# Altium PCB MCU_TO_USB.PcbDoc
Units mil, origin at the board's own origin, x right, y up, seen from the top; angles counter-clockwise.
Board outline 6000 x 4000 mil, 2 copper layers (Top Layer, Bottom Layer); 38 components, 39 nets, 148 pads, 32 vias.
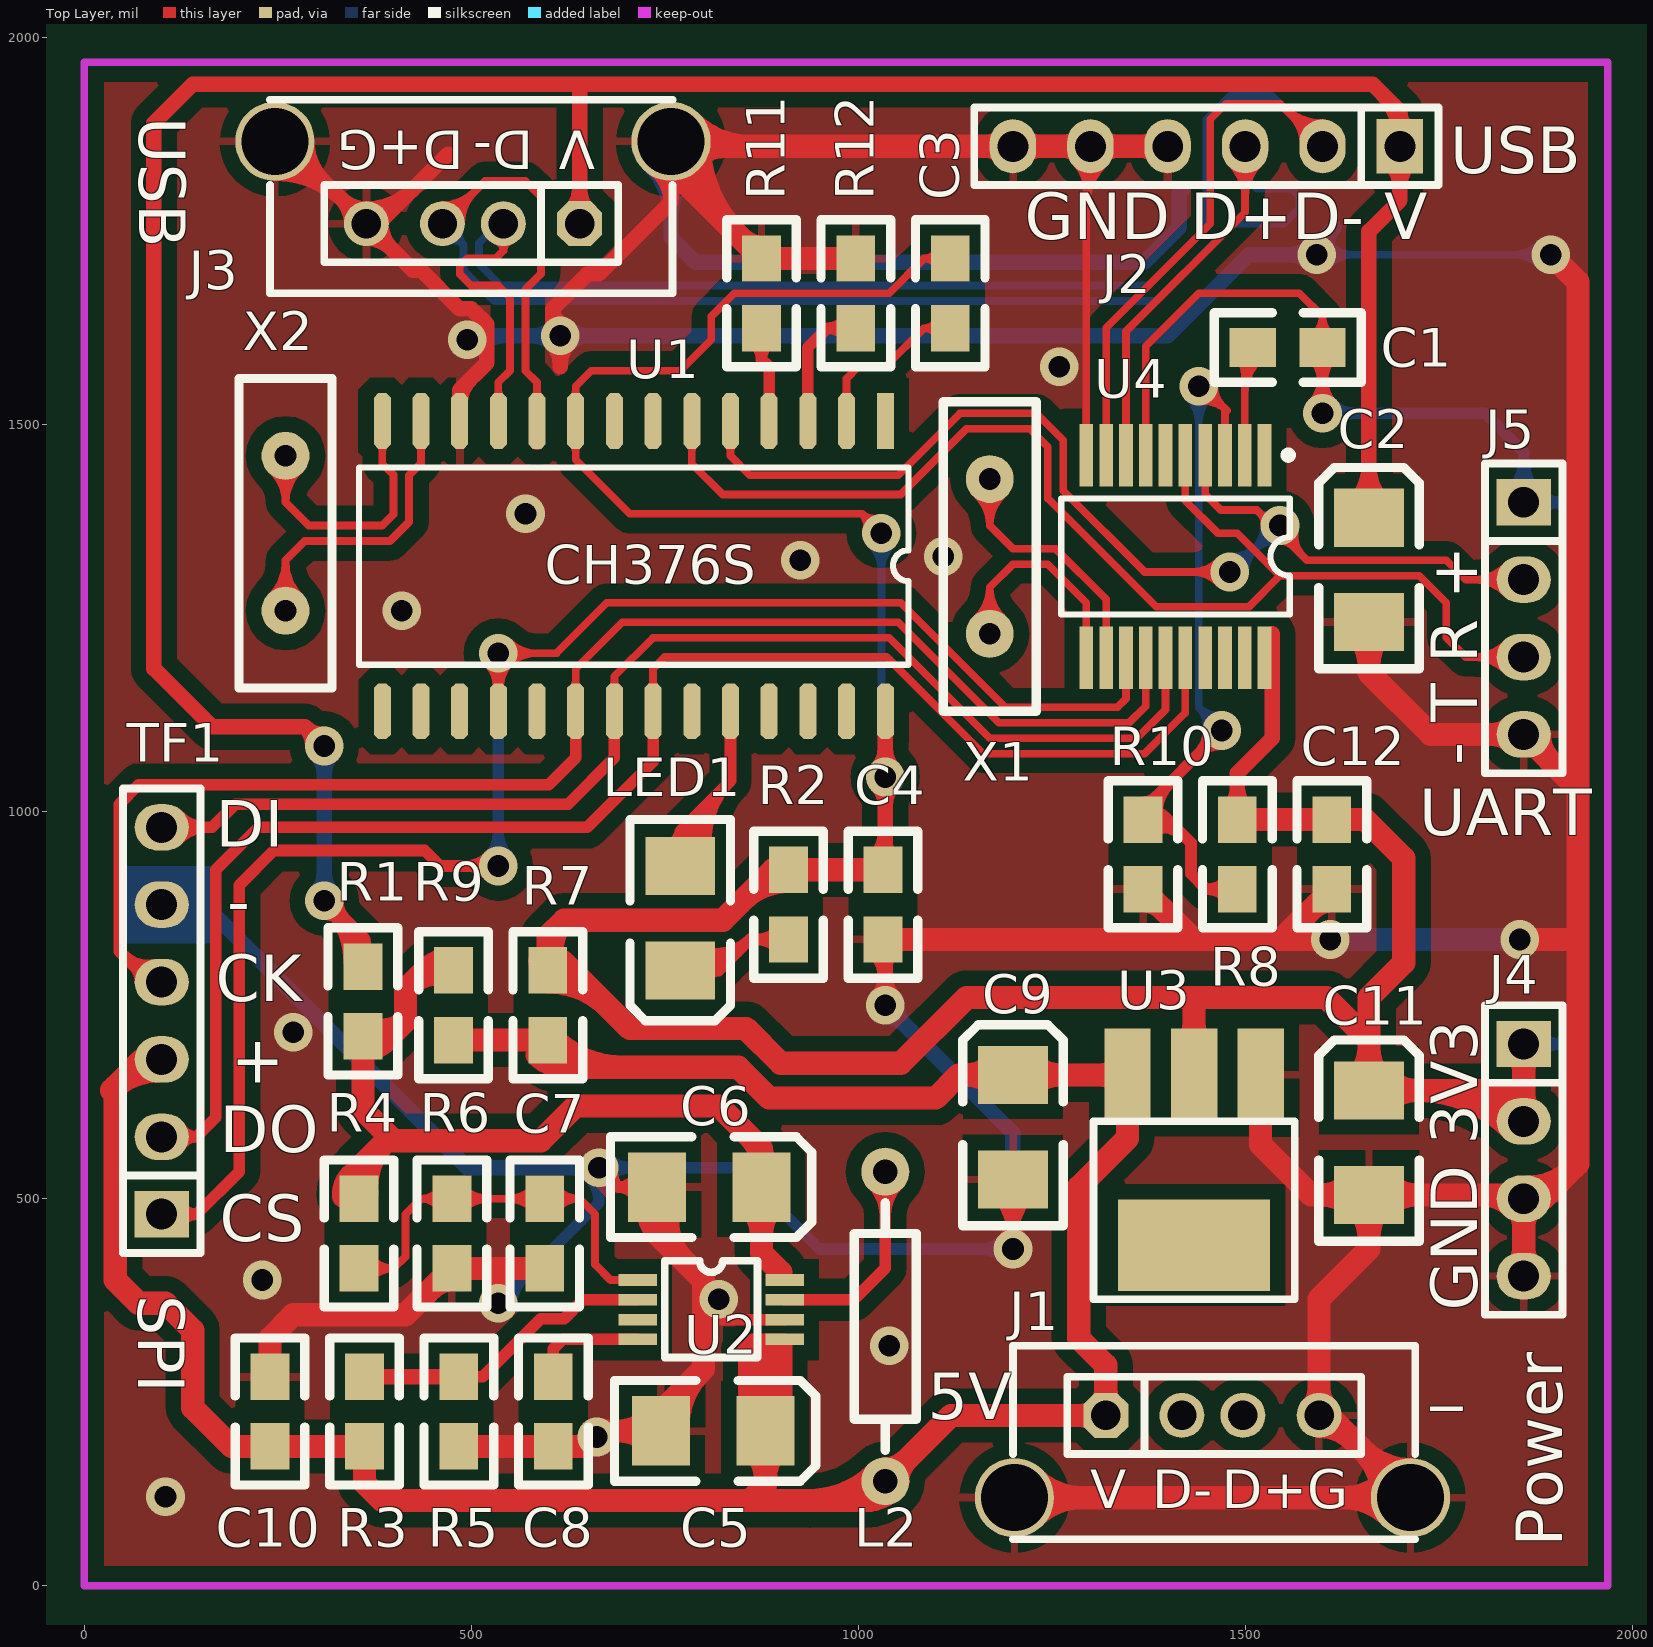
[diagram p0: Top Layer view]
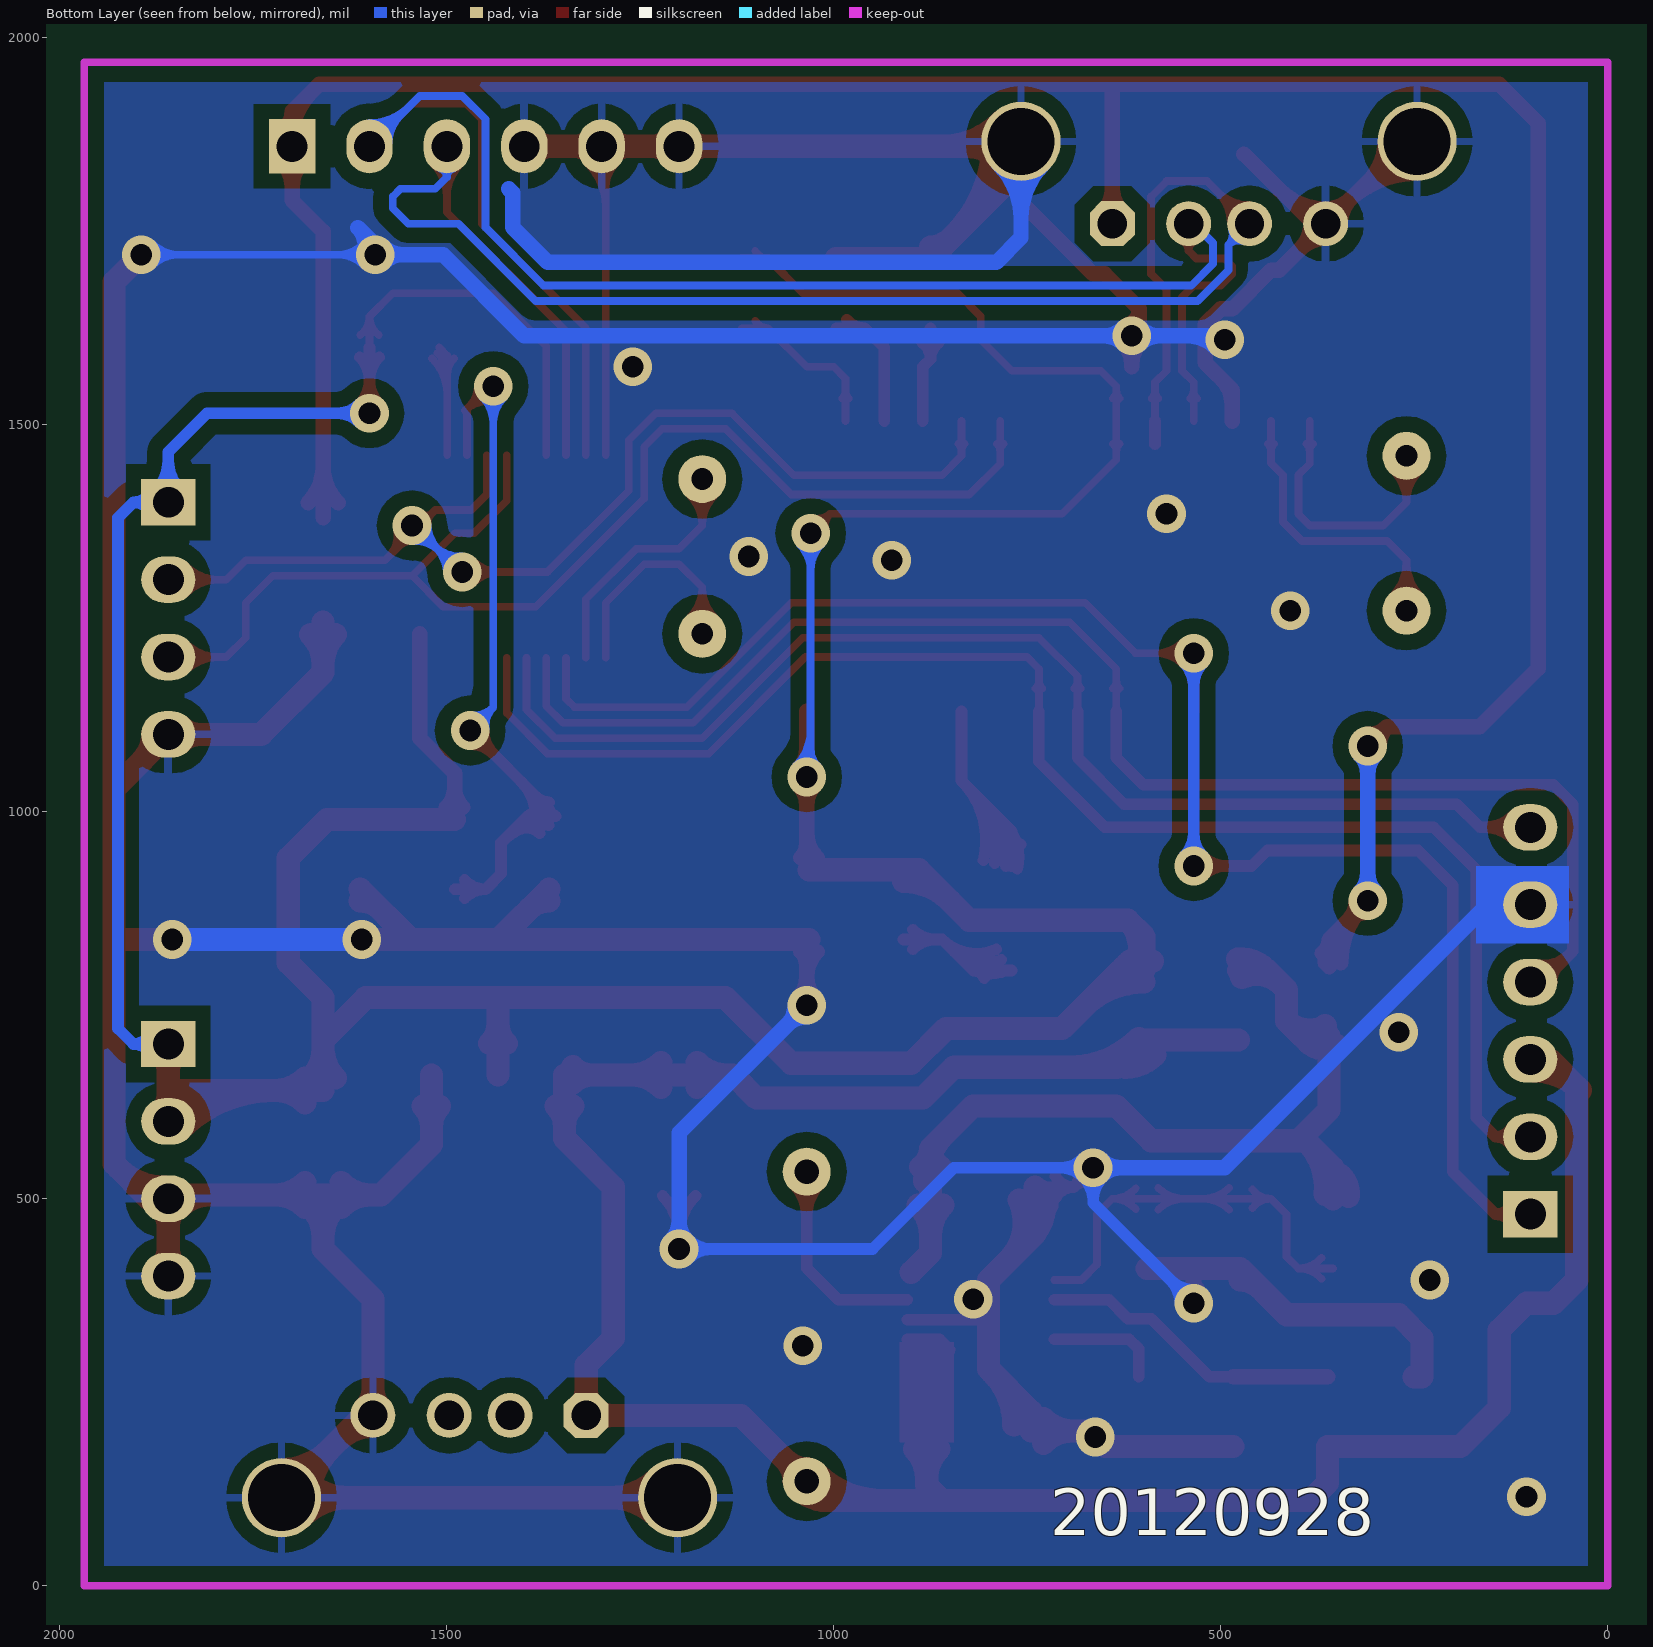
[diagram p1: Bottom Layer view, seen from below]

## Layer stack, top to bottom
Top Layer: signal copper 1.4
Dielectric: dielectric 12.6, FR-4, Dk 4.8
Bottom Layer: signal copper 1.4

## Board outline
-700,-400 5300,-400 5300,3600 -700,3600

## Design rules (kind name [scope] priority, off if disabled: settings)
Clearance Clearance_2 [(IsPad) vs (IsPad)] p1: gap=6
Clearance [(InPolygon)] p2: gap=20
Clearance Clearance_1 [All] p3: gap=10
ComponentClearance [All] p1: gap=10 collisioncheckmode=0
PolygonConnect [All] p1: connectstyle=Relief reliefconductorwidth=10 reliefentries=4 polygonreliefangle="90 Angle"
RoutingVias [All] p1: holewidth=28 width=50 viastyle="Through Hole" minholewidth=28 minwidth=50 maxholewidth=28 maxwidth=50
SolderMaskExpansion [All] p1: expansion=4
TestPointUsage [All] p1: valid=0 allowmultiple=FALSE
Testpoint [All] p1: side=15 testpointundercomponent=TRUE minsize=40 maxsize=100 preferedsize=60 minholesize=0 maxholesize=40 preferedholesize=32 testpointgrid=1 style=1023 order=1234567890
Width [All] p1: maxlimit=1000 minlimit=10 preferedwidth=10
17 further rules are at their usual default settings.

## Components (designator, comment, footprint, x,y, rotation, side; value= is the part's Value field where it differs from the comment)
C1 "0.1u" 0805 1600,1600 r180 top
C2 "47u" 3528 1660,1380 r90 top
C3 "0.1u" 0805 1119,1715 r270 top
C4 "0.01u" 0805 1032,925 r270 top
C5 "Cap Pol1" 3528 880,200 r0 top
C6 "Cap Pol1" 3528 875,515 r0 top
C7 "Cap" 0805 595,410 r90 top
C8 "Cap" 0805 606,180 r90 top
C9 "47u" 3528 1200,660 r90 top
C10 "0.1u" 0805 240,180 r90 top
C11 "10u" 3528 1660,640 r90 top
C12 "0.1u" 0805 1612,990 r270 top
J1 "USB-POWER" USBA 1320,220 r0 top
J2 "USB-SIP" SIP6 1700,1860 r180 top
J3 "USBA" USBA 640,1760 r180 top
J4 "Uart" sip4 1860,700 r270 top
J5 "Uart" sip4 1860,1400 r270 top
L2 "Inductor" AXIAL0.4 1035,135 r90 top
LED1 "LED" 3528 770,795 r270 top
R1 "2/NC" 0805 360,800 r270 top
R2 "1K" 0805 910,835 r90 top
R3 "220k" 0805 362,180 r90 top
R4 "Res2" 0805 355,410 r90 top
R5 "330k" 0805 484,270 r270 top
R6 "Res2" 0805 475,410 r90 top
R7 "0/NC" 0805 599,705 r90 top
R8 "0/NC" 0805 1490,900 r90 top
R9 "0/NC" 0805 477,705 r90 top
R10 "0/NC" 0805 1368,990 r270 top
R11 "0/NC" 0805 875,1625 r90 top
R12 "0/NC" 0805 997,1625 r90 top
TF1 "TF卡" SIP6 100,480 r90 top
U1 "CH376S" SOP28 1035,1505 r180 top
U2 "NCP1421" MICRO8 715,395 r0 top
U3 "5V->3V3" 3.3_S 1520,660 r180 top
U4 "CH376T" 20Y 1410,1330 r180 top
X1 "12MHz" XTAL1 1170,1230 r90 top
X2 "12MHz" XTAL1 260,1260 r90 top

## Footprints (in the part's own frame and the unit in brackets; to place one, negate y for a bottom-side part, rotate by r counter-clockwise, add the part's x,y. Pads: shape width x height; smd on the part's side, far side on the other; paste and mask are expansions set on the pad)
3.3_S [mil]
  rect 60x120 smd: 1(0,0) 2(86,0) 3(172,0)
  rect 196.85x118.11 smd: ""(86,220)
  silkscreen extent -44,60 216,290
20Y [mm] "SSOP; 20 Leads; Body Width 5.3 mm; Pitch 0.65 mm"
  rect 0.45x2.05 smd: 1(-2.925,-3.325) 2(-2.275,-3.325) 3(-1.625,-3.325) 4(-0.975,-3.325) 5(-0.325,-3.325) 6(0.325,-3.325) 7(0.975,-3.325) 8(1.625,-3.325) 9(2.275,-3.325) 10(2.925,-3.325) 11(2.925,3.325) 12(2.275,3.325) 13(1.625,3.325) 14(0.975,3.325) 15(0.325,3.325) 16(-0.325,3.325) 17(-0.975,3.325) 18(-1.625,3.325) 19(-2.275,3.325) 20(-2.925,3.325)
  silkscreen extent -3.82,-3.45 3.75,1.9
0805 [mil]
  rect 60x50 smd: 1(0,0) 2(90,0)
  silkscreen extent -50,-45 140,45
3528 [mil]
  rect 75x90 smd: 1(0,0) 2(-135,0)
  silkscreen extent -195,-65 65,65
AXIAL0.4 [mil]
  round 62 hole 32: 1(0,0) 2(400,0)
  silkscreen extent 40,-40 360,40
MICRO8 [mil]
  rect 50x15 smd: 1(0,0) 2(0,-25.6) 3(0,-51.2) 4(0,-76.8) 5(190,-76.8) 6(190,-51.2) 7(190,-25.6) 8(190,0)
  silkscreen extent 35,-100 155,25
sip4 [mil]
  rect 60x70 hole 40: 1(0,0)
  oval 60x70 hole 40: 2(100,0) 3(200,0) 4(300,0)
  silkscreen extent -50,-50 350,50
SIP6 [mil]
  rect 60x70 hole 40: 1(0,0)
  oval 60x70 hole 40: 2(100,0) 3(200,0) 4(300,0) 5(400,0) 6(500,0)
  silkscreen extent -50,-50 550,50
SOP28 [mil]
  rect 22x72 smd: 1(0,0)
  oct 22x72 smd: 2(50,0) 3(100,0) 4(150,0) 5(200,0) 6(250,0) 7(300,0) 8(350,0) 9(400,0) 10(450,0) 11(500,0) 12(550,0) 13(600,0) 14(650,0) 15(650,375) 16(600,375) 17(550,375) 18(500,375) 19(450,375) 20(400,375) 21(350,375) 22(300,375) 23(250,375) 24(200,375) 25(150,375) 26(100,375) 27(50,375) 28(0,375)
  silkscreen extent -30,60 680,315
USBA [mm]
  oct 1.473x1.473 hole 0.965: 1(0,0)
  round 1.473 hole 0.965: 2(2.5,0) 3(4.5,0) 4(7,0)
  round 2.6 hole 2.2: 5(-3,-2.7) 6(10,-2.7)
  silkscreen extent -3.05,-4.06 10.16,2.29
XTAL1 [mil]
  round 62 hole 28: 1(0,0) 2(200,0)
  silkscreen extent -100,-60 300,60

## Part data
C1 C3 C4: library part Pro7B.tmp_0.01u_17
C2 C9: library part Pro7B.tmp_100u_13
C5 C6: "Polarized Capacitor (Radial)"
C7 C8: "Capacitor"
C10 C12: library part Pro7B.tmp_0.1u_8
C11: library part Pro7B.tmp_10u_11
J1 J2 J3: library part Pro7B.tmp_USB_24
J4 J5: library part MHDR1X4, "Header, 4-Pin"
R1 R2 R7 R8 R9 R10 R11 R12: library part Pro7B.tmp_3_14
R3 R5: library part Res2, "Resistor"
R4 R6: "Resistor"
TF1: library part CON6, "Connector"
U1: "USB Host and SD card Host with File System & USB Device for MCU, parallel / SPI / UART Serial"
U2: "U?"
U3: library part Pro7B.tmp_5V->3V3_12
U4: library part "Header 10X2A", "Header, 10-Pin, Dual row"
X1 X2: library part Pro7B.tmp_12MHz_19

## Via types
v1: diameter 50, hole 28, Top Layer to Bottom Layer, 32 vias

## Nets (pads, with @x,y where several pads share a name; then routed paths per layer and width w, separated by ;. In a path a pad name is that pad's centre, name@x,y a point inside that pad or via, vN(x,y) a via of type N, cw(c..) or ccw(c..) an arc to the next point about the centre after c; other vN are vias at no path point)
A0: U1.8
ACT#: LED1.2 U1.24 | length 618.6
  Top Layer w15: LED1.2@758.46,957.69 ccw(c751.25,975) 770,975 ; LED1.2@762.95,926.35 cw(c821.63,941.07) 778.85,983.85 ; LED1.2 770,975 ; LED1.2@777.5,930 cw(c851.55,948.58) 797.57,1002.57 ; LED1.2@781.54,957.69 cw(c788.75,975) 770,975 ; LED1.2@792.05,933.65 cw(c881.47,956.09) 816.28,1021.28 ; LED1.2@806.6,937.3 cw(c911.4,963.6) 835,1040 ; U1.24 835,1040 ; 770,975 835,1040
CS#: U1.27
D0: U1.15
D1: U1.16
D2: U1.17
D3/SCS: TF1.1 U1.18 U4.13 | length 2551.5
  Top Layer w10: v1@535,1195 v1@545,1205 ; v1(535,1205) 610,1205 675,1270 1055,1270 1190,1135 1335,1135 1346.02,1146.02 U4.13 ; v1@549.14,1190.86 cw(c583.28,1156.72) 583.28,1205 cw(c583.28,1253.28) v1@549.14,1219.14
  Top Layer w15: TF1.1 145,480 ; TF1.1@124.23,468.32 cw(c145,455.7) 145,480 ; TF1.1@124.23,491.68 ccw(c145,504.3) 145,480 ; v1@522.63,917.63 ccw(c492.75,887.75) 492.75,930 ccw(c492.75,972.25) v1@522.63,942.37 ; v1@522.63,1192.63 cw(c492.75,1162.75) 535,1162.75 cw(c577.25,1162.75) v1@547.37,1192.63 ; v1(535,930) 460,930 440,950 245,950 200,905 200,535 145,480 ; U1.18 v1@535,1195
  Bottom Layer w15: v1@522.63,942.37 ccw(c492.75,972.25) 535,972.25 ccw(c577.25,972.25) v1@547.37,942.37 ; v1@522.63,1192.63 cw(c492.75,1162.75) 535,1162.75 cw(c577.25,1162.75) v1@547.37,1192.63 ; v1(535,930) v1(535,1205)
D4: U1.19
D5/SCK: TF1.4 U1.20 U4.14 | length 1979.3
  Top Layer w10: U1.20@630.76,1159.24 ccw(c620.51,1169.49) 635,1169.49 ccw(c649.49,1169.49) U1.20@639.24,1159.24 ; U1.20 635,1185 695,1245 1051.72,1245 1181.72,1115 1350,1115 1371.61,1136.61 U4.14
  Top Layer w15: 50,815 ccw(c82.8,847.8) TF1.4@91.02,802.14 ; 63.66,801.34 cw(c42.32,780) TF1.4@72.5,780 ; TF1.4@110,780 85,780 45,820 45,1010 70,1035 600,1035 635,1070 U1.20
D6/SDI: TF1.6 U1.21 U4.15 | length 1704.4
  Top Layer w10: U1.21@680.76,1159.24 ccw(c670.51,1169.49) 685,1169.49 ccw(c699.49,1169.49) U1.21@689.24,1159.24 ; U1.21 685,1175 735,1225 1040,1225 1170,1095 1360,1095 1397.2,1132.2 U4.15
  Top Layer w15: TF1.6 165,980 195,1010 625,1010 685,1070 U1.21 ; TF1.6@120.91,964.09 cw(c159.32,925.68) 159.32,980 cw(c159.32,1034.32) TF1.6@120.91,995.91
D7/SDO: TF1.2 U1.22 U4.16 | length 2054.9
  Top Layer w10: U1.22@730.76,1159.24 ccw(c720.51,1169.49) 735,1169.49 ccw(c749.49,1169.49) U1.22@739.24,1159.24 ; U1.22 735,1185 750,1200 1036.72,1200 1161.72,1075 1370,1075 1422.8,1127.8 U4.16
  Top Layer w15: TF1.2 145,580 ; TF1.2@124.23,568.32 cw(c145,555.7) 145,580 ; TF1.2@124.23,591.68 ccw(c145,604.3) 145,580 ; U1.22 735,1065 650,980 225,980 170,925 170,605 145,580
GND: C2.2 C4.2 C5.2 C6.2 C7.1 C8.1 C9.2 C10.2 C11.2 C12.2 J1.4 J1.5 J1.6 J2.4 J2.5 J2.6 J3.4 J3.5 J3.6 J4.3 J4.4 J5.4 R5.2 R6.1 R10.2 R11.2 R12.2 TF1.5 U1.12 U2.6 U3.1 U4.10 | length 17225.1
  Top Layer w10: J2.5@1282.32,1837.32 cw(c1252.1,1807.1) 1294.84,1807.1 ; U4.10 J2.5@1294.84,1854.84 ; 1294.84,1782.19 cw(c1372.81,1782.19) J2.5@1317.68,1837.32 ; 1294.84,1806.34 cw(c1348.66,1806.34) J2.5@1310.61,1844.39
  Top Layer w15: v1@522.63,377.37 ccw(c492.75,407.25) 535,407.25 ccw(c577.25,407.25) v1@547.37,377.37 ; v1(535,365) 535,410 ; v1(665,540) 690,515 ; v1@667.34,522.66 cw(c670.93,495.94) 690,515 ; v1@682.34,537.66 ccw(c709.06,534.07) 690,515 ; C6.2@713.53,500.88 ccw(c690,488.34) 690,515 ; C6.2@713.53,529.12 cw(c690,541.66) 690,515 ; C6.2 690,515 ; 800,345 801.2,343.8 U2.6 ; C9.2@1178.79,503.79 cw(c1127.57,452.57) 1200,452.57 cw(c1272.43,452.57) C9.2@1221.21,503.79 ; v1@1187.63,447.37 ccw(c1157.75,477.25) 1200,477.25 ccw(c1242.25,477.25) v1@1212.37,447.37 ; v1(1200,435) C9.2
  Top Layer w20: J3.6@246.3,1825.12 cw(c246.3,1697.18) 336.76,1787.65 ; J3.6@246.3,1845.12 cw(c246.3,1765.47) 302.62,1821.79 ; J3.6 258.11,1866.3 424.41,1700 435,1700 485,1650 500,1650 520,1630 520,1580 485,1545 U1.12 ; J3.6@287.48,1866.3 ccw(c358.38,1866.3) 308.25,1816.16 ; J3.4@345.41,1760 ccw(c299.54,1760) 331.97,1792.44 ccw(c364.41,1824.87) 364.41,1779 ccw(c364.41,1862.51) 423.46,1803.46 ; J3.4@364.41,1741 cw(c364.41,1695.13) 396.84,1727.56 cw(c429.28,1760) J3.4@383.41,1760 ; J3.4 380,1760 470,1850 ; U1.12@486,1530 cw(c524.63,1530) 497.31,1557.31 ; v1(495,1610) 520,1610 ; v1@604.39,1604.39 cw(c578.79,1578.79) 615,1578.79 cw(c651.21,1578.79) v1@625.61,1604.39 ; 615,1575 v1(615,1615) 605,1625 605,1650 ; v1@619.86,1629.19 cw(c627,1650) 605,1650 ; J3.5@734.82,1832.34 cw(c704.48,1788.11) 758.11,1788.11 ; J3.5@741.81,1850 J3.5 758.11,1788.11 ; J3.5@781.4,1832.34 ccw(c811.74,1788.11) 758.11,1788.11 ; C4.2@1021.39,819.39 cw(c988.54,786.54) 1035,786.54 ; v1@1024.39,760.61 ccw(c998.79,786.21) 1035,786.21 ccw(c1071.21,786.21) v1@1045.61,760.61 ; C4.2 1035,832 v1(1035,750) ; 1035,801.03 cw(c1060.97,801.03) C4.2@1042.61,819.39 ; 605,1650 650,1695 665,1695 758.11,1788.11
  Top Layer w30: C10.2@250,270 C10.2 240,320 270,350 415,350 R6.1 C7.1 ; 449.39,384.39 cw(c475,358.79) R6.1@475,395 ; R5.2 650,180 670,200 C5.2 745,225 800,280 800,395 740,455 ; C5.2@729.09,184.09 ccw(c690.68,145.68) 690.68,200 ccw(c690.68,254.32) C5.2@729.09,215.91 ; C6.2@733.21,510.69 ccw(c780.55,488.43) 743.56,451.44 ; C6.2 740,455 ; J3.5 758.11,1831.89 R11.2 R12.2 ; C6.2@760.36,497.92 ccw(c821.61,469.11) 773.75,421.25 ; J3.5@764.29,1866.3 ccw(c862.28,1866.3) 792.99,1797.01 ; J3.5@764.41,1860 J2.4 ; C5.2@767.5,207.5 cw(c864.07,207.5) 795.78,275.78 ; J3.5@783.69,1840.72 cw(c830.25,1794.16) 830.25,1860 ; J3.5@783.69,1891.88 ccw(c860.67,1968.85) 860.67,1860 ; J3.5@794.29,1866.3 ccw(c964.71,1866.3) 844.21,1745.79 ; 849.39,1740.61 ccw(c875,1766.21) R11.2@875,1730 ; C4.2 v1(1610,835) ; J2.6@1189.39,1849.39 ccw(c1163.79,1823.79) 1163.79,1860 ccw(c1163.79,1896.21) J2.6@1189.39,1870.61 ; J1.5 J1.6 1607.4,220 J1.4 1595.59,370.59 1660,435 C11.2 ; J2.6@1210.61,1849.39 cw(c1236.21,1823.79) 1236.21,1860 cw(c1236.21,1896.21) J2.6@1210.61,1870.61 ; J1.5@1227.47,88.12 cw(c1289.24,26.35) 1289.24,113.7 cw(c1289.24,201.05) J1.5@1227.47,139.28 ; J2.5@1289.39,1849.39 ccw(c1263.79,1823.79) 1263.79,1860 ccw(c1263.79,1896.21) J2.5@1289.39,1870.61 ; J2.5@1310.61,1849.39 cw(c1336.21,1823.79) 1336.21,1860 cw(c1336.21,1896.21) J2.5@1310.61,1870.61 ; R10.2@1368,885 cw(c1368,848.79) 1393.61,874.39 ; R10.2 1433,835 ; J2.4@1389.39,1849.39 ccw(c1363.79,1823.79) 1363.79,1860 ccw(c1363.79,1896.21) J2.4@1389.39,1870.61 ; U3.1@1509.39,619.39 cw(c1483.79,593.79) 1520,593.79 cw(c1556.21,593.79) U3.1@1530.61,619.39 ; U3.1 1520,570 1585,505 1855,505 J4.3 ; 1547,835 C12.2 ; J1.4@1585.69,229.9 ccw(c1561.79,253.8) 1595.59,253.8 ccw(c1629.39,253.8) J1.4@1605.49,229.9 ; 1586.39,874.39 cw(c1612,848.79) C12.2@1612,885 ; J1.4@1595.59,206 cw(c1595.59,143.69) 1639.65,187.75 ; C11.2@1636.59,489.09 ccw(c1598.18,450.68) 1598.18,505 ccw(c1598.18,559.32) C11.2@1636.59,520.91 ; C11.2@1644.09,489.09 cw(c1605.68,450.68) 1660,450.68 cw(c1714.32,450.68) C11.2@1675.91,489.09 ; C2.2@1644.09,1229.09 cw(c1605.68,1190.68) 1660,1190.68 cw(c1714.32,1190.68) C2.2@1675.91,1229.09 ; C2.2 1660,1180 1740,1100 J5.4 1930,1030 ; J1.6@1677.52,113.7 ccw(c1590.17,113.7) 1651.94,175.47 ccw(c1713.7,237.23) J1.6@1713.7,149.88 ; C11.2@1683.41,489.09 cw(c1721.82,450.68) 1721.82,505 cw(c1721.82,559.32) C11.2@1683.41,520.91 ; J1.6@1688.12,88.12 ccw(c1626.35,26.35) 1626.35,113.7 ccw(c1626.35,201.05) J1.6@1688.12,139.28 ; 1806.72,505 cw(c1806.72,451.72) J4.3@1844.39,489.39 ; J5.4@1844.39,1089.39 ccw(c1818.79,1063.79) 1818.79,1100 ccw(c1818.79,1136.21) J5.4@1844.39,1110.61 ; J4.4@1849.39,410.61 ccw(c1823.79,436.21) 1860,436.21 ccw(c1896.21,436.21) J4.4@1870.61,410.61 ; J4.3@1849.39,489.39 cw(c1823.79,463.79) 1860,463.79 cw(c1896.21,463.79) J4.3@1870.61,489.39 ; v1(1855,835) 1930,835 ; J4.4 J4.3 ; J4.3@1865,515 ccw(c1865,599.5) 1924.75,539.75 ; J5.4@1880,1100 ccw(c1928.28,1100) 1894.14,1065.86 ; v1(1895,1720) 1930,1685 1930,545 1885,500 J4.3 ; 740,455 ccw(c690.01,455) 724.48,491.21 cw(c690.01,455) 740,455 ; 740,455 cw(c789.99,455) 755.52,491.21 ccw(c789.99,455) 740,455
  Bottom Layer w10: v1(1592.59,1720) v1(1895,1720) ; v1@1606.73,1705.86 cw(c1640.88,1671.72) 1640.88,1720 cw(c1640.88,1768.28) v1@1606.73,1734.14 ; v1@1880.86,1705.86 ccw(c1846.72,1671.72) 1846.72,1720 ccw(c1846.72,1768.28) v1@1880.86,1734.14
  Bottom Layer w15: v1(535,365) 665,495 v1(665,540) 845,540 950,435 v1(1200,435) ; v1@535,382.5 ccw(c535,424.75) 564.87,394.87 ccw(c594.75,365) v1@552.5,365 ; v1@652.63,527.63 cw(c622.75,497.75) 665,497.75 cw(c707.25,497.75) 677.37,527.63 cw(c707.25,497.75) 707.25,540 cw(c707.25,582.25) v1@677.37,552.37 ; v1@1187.63,422.63 ccw(c1157.75,392.75) 1157.75,435 ccw(c1157.75,477.25) v1@1187.63,447.37
  Bottom Layer w20: TF1.5 155,880 495,540 v1(665,540) ; TF1.5@119.14,865.86 cw(c153.28,831.72) 153.28,880 cw(c153.28,928.28) TF1.5@119.14,894.14 ; v1(495,1610) 500,1615 1400,1615 1505,1720 1580,1720 1615,1755 ccw(c1637.21,1732.78) v1@1607.01,1724.13 ; v1@505.61,1599.39 cw(c543.28,1561.72) 543.28,1615 ; v1@604.39,1604.39 ccw(c578.79,1578.79) 578.79,1615 ccw(c578.79,1651.21) v1@604.39,1625.61 ; v1@625.61,1604.39 cw(c651.21,1578.79) 651.21,1615 cw(c651.21,1651.21) v1@625.61,1625.61 ; v1@654.39,529.39 ccw(c628.79,503.79) 628.79,540 ccw(c628.79,576.21) v1@654.39,550.61 ; J3.5@728.99,1837.18 cw(c658.69,1766.88) 758.11,1766.88 cw(c857.53,1766.88) J3.5@787.23,1837.18 ; J3.5 758.11,1741.89 790,1710 1369.64,1710 1415,1755.36 1415,1800 1420,1805 ; v1@1035,735 cw(c1035,698.79) 1060.61,724.39 cw(c1086.21,750) v1@1050,750 ; v1(1035,750) 1200,585 v1(1200,435) ; v1@1189.39,445.61 ccw(c1163.79,471.21) 1200,471.21 ccw(c1236.21,471.21) v1@1210.61,445.61 ; v1@1581.99,1709.39 ccw(c1556.38,1683.79) 1556.38,1720 ccw(c1556.38,1756.21) v1@1581.99,1730.61
  Bottom Layer w30: v1(1610,835) v1(1855,835)
  other v1: 105,115 662.22,192.22 1040,310 820,370 230,395 270,715 410,1260 925,1325 1110,1330 570,1385 1260,1575
INT#: U1.1
NetC1_2: C1.2 U4.2 | length 252.8
  Top Layer w10: C1.2@1490.86,1585.86 cw(c1469.83,1564.83) 1499.57,1564.83 ; U4.2 1499.57,1589.57 C1.2 ; 1499.57,1538.6 cw(c1566.4,1538.6) C1.2@1519.14,1585.86 ; 1499.57,1562.74 cw(c1542.26,1562.74) C1.2@1512.07,1592.93
NetC7_2: C7.2 R4.1 R6.2 U2.1 | length 854.3
  Top Layer w10: R4.1 400,410 ; R4.1@369.85,396.6 cw(c400,369.38) 400,410 ; R4.1@369.85,423.4 ccw(c400,450.62) 400,410 ; R6.2@459,488 ccw(c435,470) 435,500 ; R6.2@459,512 cw(c435,530) 435,500 ; R6.2@489.14,485.86 cw(c523.28,451.72) 523.28,500 cw(c523.28,548.28) R6.2@489.14,514.14 ; C7.2@580.86,485.86 ccw(c546.72,451.72) 546.72,500 ccw(c546.72,548.28) C7.2@580.86,514.14 ; C7.2@609.85,486.6 cw(c640,459.38) 640,500 ; C7.2@609.85,513.4 ccw(c640,540.62) 640,500 ; U2.1 680,395 660,415 660,480 640,500 ; 400,410 415,425 415,480 435,500 ; 435,500 640,500
NetC8_2: C8.2 U2.4 | length 150.1
  Top Layer w15: C8.2 606,306 618.2,318.2 U2.4
NetL2_2: L2.2 U2.7 | length 360.9
  Top Layer w15: U2.7 994.4,369.4 1035,410 L2.2 ; L2.2@1018.38,518.38 cw(c978.27,478.27) 1035,478.27 cw(c1091.73,478.27) L2.2@1051.62,518.38
NetLED1_1: LED1.1 R2.1 | length 457.9
  Top Layer w15: LED1.1 820,795 ; LED1.1@777.5,795 ccw(c796.67,837.13) 829.4,804.4 ; LED1.1@783.71,808.65 ccw(c806.24,858.16) 844.7,819.7 ; LED1.1@789.93,822.31 ccw(c815.81,879.19) 860,835 ; LED1.1@805.77,784.95 cw(c820,779.9) 820,795 ; LED1.1@805.77,805.05 ccw(c820,810.1) 820,795 ; R2.1@897.63,822.63 ccw(c867.75,792.75) 867.75,835 ccw(c867.75,877.25) R2.1@897.63,847.37 ; R2.1 860,835 ; 820,795 860,835
NetR3_2: R3.2 R5.1 U2.2 | length 394.2
  Top Layer w15: R5.1 515,270 590,345 620,345 644.4,369.4 U2.2
  Top Layer w20: R3.2 R5.1
NetU4_11: U4.11 X1.1 | length 437.5
  Top Layer w10: X1.1@1152.22,1248.97 ccw(c1113.78,1290) 1170,1290 ; X1.1@1159.06,1241.68 ccw(c1135.4,1266.92) 1170,1266.92 ccw(c1204.6,1266.92) X1.1@1180.94,1241.68 ; X1.1 1170,1290 ; X1.1@1187.78,1248.97 cw(c1226.22,1290) 1170,1290 ; U4.11 1294.84,1270.16 1245,1320 1200,1320 1170,1290
NetU4_12: U4.12 X1.2 | length 474
  Top Layer w10: X1.2@1152.22,1411.03 cw(c1113.78,1370) 1170,1370 ; X1.2@1159.06,1418.32 cw(c1135.4,1393.08) 1170,1393.08 cw(c1204.6,1393.08) X1.2@1180.94,1418.32 ; X1.2 1170,1370 ; X1.2@1187.78,1411.03 ccw(c1226.22,1370) 1170,1370 ; U4.12 1320.43,1274.57 1255,1340 1200,1340 1170,1370
RD#: R11.1 U1.4 | length 172.8
  Top Layer w15: R11.1@864.5,1606 cw(c848.75,1585) 875,1585 ; R11.1 875,1585 ; U1.4 885,1575 875,1585 ; R11.1@885.5,1606 ccw(c901.25,1585) 875,1585
RSTI: C3.2 U1.2 | length 278.9
  Top Layer w10: U1.2@980.76,1534.24 ccw(c970.51,1544.49) 985,1544.49 ccw(c999.49,1544.49) U1.2@989.24,1534.24 ; U1.2 985,1560 1000,1575 1035,1575 1085,1625 ; C3.2@1101.52,1615.28 ccw(c1085,1606.1) 1085,1625 ; C3.2@1101.52,1634.72 cw(c1085,1643.9) 1085,1625 ; C3.2 1085,1625
RXD: J5.3 U1.6 U4.5 | length 1798.2
  Top Layer w10: U1.6@780.76,1475.76 cw(c770.51,1465.51) 785,1465.51 cw(c799.49,1465.51) U1.6@789.24,1475.76 ; U1.6 785,1450 825,1410 1055,1410 1140,1495 1221.72,1495 1245,1471.72 1245,1405 1385,1265 1505,1265 1545,1305 ; U4.5 1422.8,1402.2 1465,1360 1490,1360 1545,1305 ; J5.3@1837.32,1182.32 ccw(c1794.64,1139.64) 1794.64,1200 ccw(c1794.64,1260.36) J5.3@1837.32,1217.68 ; J5.3@1844.39,1189.39 ccw(c1818.79,1163.79) 1818.79,1200 ccw(c1818.79,1236.21) J5.3@1844.39,1210.61 ; J5.3 1785,1200 1760,1225 1760,1270 1725,1305 1545,1305
SDCK: U1.26
SDCS: U1.23
SDDI: U1.25
SDDO: U1.7
SPI#: R8.1 R10.1 U4.3 | length 1597.1
  Top Layer w10: v1@1441.25,1540.08 cw(c1444.38,1515.3) 1462.04,1532.96 ; v1@1442.5,1530.16 cw(c1447.62,1489.67) 1476.47,1518.53 ; v1@1445,1550 1473.98,1521.02 U4.3 ; v1@1460,1550 ccw(c1496.21,1550) 1470.61,1524.39
  Top Layer w15: R10.1@1359.48,994.15 cw(c1377.65,974.63) 1396.51,993.49 ; R10.1@1366.27,997.38 cw(c1372.75,950.95) 1405.9,984.1 ; R10.1@1368,1012.5 ccw(c1368,1035.43) R10.1@1384.22,1019.22 ; R10.1@1368.35,982.52 cw(c1377.97,913.57) 1427.2,962.8 ; R10.1@1369.7,983.17 cw(c1388.25,963.24) 1407.51,982.49 ; R10.1@1379.92,972.19 cw(c1398.85,951.86) 1418.5,971.5 ; R10.1@1382.73,980.56 cw(c1400,969.49) 1400,990 ; R10.1@1382.73,999.44 ccw(c1400,1010.51) 1400,990 ; R10.1@1385.5,995 cw(c1447.06,995) 1403.53,1038.53 ; v1(1440,1550) v1@1445,1550 ; v1@1452.5,1105 cw(c1410.25,1105) 1440.13,1075.13 cw(c1470,1045.25) v1@1470,1087.5 ; v1(1470,1105) 1368,1003 R10.1 1400,990 ; R8.1@1477.15,888.12 ccw(c1450,863.04) 1450,900 ; R8.1@1477.15,911.88 cw(c1450,936.96) 1450,900 ; R8.1 1450,900 ; 1400,990 1430,960 1430,920 1450,900
  Bottom Layer w10: v1@1425.86,1535.86 cw(c1391.72,1501.72) 1440,1501.72 cw(c1488.28,1501.72) v1@1454.14,1535.86 ; v1(1440,1550) 1440,1135 ; v1@1450.09,1106.91 ccw(c1415.26,1110.25) 1440,1135 ; v1@1468.09,1124.91 cw(c1464.75,1159.74) 1440,1135 ; v1(1470,1105) 1440,1135
TXD: J5.2 U1.5 U4.4 | length 1974.6
  Top Layer w10: U1.5@830.76,1475.76 cw(c820.51,1465.51) 835,1465.51 cw(c849.49,1465.51) U1.5@839.24,1475.76 ; U1.5 835,1460 860,1435 1051.72,1435 1131.72,1515 1230,1515 1265,1480 1265,1415 1370,1310 v1(1480,1310) ; U4.4 1448.39,1410 1468.39,1390 1515,1390 1580,1325 1760,1325 1785,1300 J5.2 ; v1@1465.86,1295.86 ccw(c1431.72,1261.72) 1431.72,1310 ccw(c1431.72,1358.28) v1@1465.86,1324.14 ; v1@1525.05,1371.44 ccw(c1507.7,1372.7) 1520,1385 ccw(c1525.88,1390.88) v1@1531.49,1384.75 ; v1@1540,1365 v1(1545,1370) ; v1@1545,1350 cw(c1545,1325.86) 1562.07,1342.93 cw(c1581.21,1362.07) v1@1554.77,1367.86 ; v1@1564.54,1365.72 ccw(c1602.42,1357.43) 1575,1330 ; J5.2@1837.32,1282.32 ccw(c1794.64,1239.64) 1794.64,1300 ccw(c1794.64,1360.36) J5.2@1837.32,1317.68 ; J5.2@1844.39,1289.39 ccw(c1818.79,1263.79) 1818.79,1300 ccw(c1818.79,1336.21) J5.2@1844.39,1310.61
  Bottom Layer w10: v1(1480,1310) v1(1545,1370) ; v1@1480.8,1329.98 ccw(c1482.73,1378.23) 1515.48,1342.75 ccw(c1548.23,1307.27) v1@1499.98,1309.2 ; v1@1525.02,1370.8 cw(c1476.77,1372.73) 1509.52,1337.25 cw(c1542.27,1301.77) v1@1544.2,1350.02
UD+: J2.3 J3.3 U1.10 U4.8 | length 2728.4
  Top Layer w10: J3.3 517.83,1815 570,1815 590,1795 590,1695 570,1675 570,1570 585,1555 U1.10 ; J3.3@462.83,1774 ccw(c462.83,1807.8) 486.73,1783.9 ccw(c510.63,1760) J3.3@476.83,1760 ; J3.3@462.83,1784 ccw(c462.83,1841.94) 503.81,1800.97 ccw(c544.78,1760) J3.3@486.83,1760 ; U1.10@580.76,1534.24 ccw(c570.51,1544.49) 585,1544.49 ccw(c599.49,1544.49) U1.10@589.24,1534.24 ; U4.8 1346.02,1621.02 1500,1775 J2.3 ; J2.3@1482.32,1837.32 cw(c1439.64,1794.64) 1500,1794.64 cw(c1560.36,1794.64) J2.3@1517.68,1837.32 ; J2.3@1489.39,1844.39 cw(c1463.79,1818.79) 1500,1818.79 cw(c1536.21,1818.79) J2.3@1510.61,1844.39
  Top Layer w15: U1.10@585,1475 U1.10
  Bottom Layer w10: J3.3 490,1732.83 ; J3.3@470.64,1737.31 cw(c476.74,1719.58) 490,1732.84 ; J3.3@485.53,1752.19 ccw(c503.25,1746.09) 490,1732.84 ; J2.3 1500,1820 ; 490,1732.83 490,1700 530,1660 1385,1660 1485,1760 1550,1760 1570,1780 1570,1795 1560,1805 1515,1805 1500,1820 ; 1500,1820 ccw(c1488,1820) 1491.89,1831.35 cw(c1488,1820) 1500,1820 ; 1500,1820 cw(c1512,1820) 1508.11,1831.35 ccw(c1512,1820) 1500,1820
UD-: J2.2 J3.2 U1.11 U4.9 | length 2720.9
  Top Layer w10: U1.11@530.76,1534.24 ccw(c520.51,1544.49) 535,1544.49 ccw(c549.49,1544.49) U1.11@539.24,1534.24 ; J3.2@532.93,1737.61 cw(c528.06,1725) 541.57,1725 ; U1.11 535,1555 550,1570 550,1665 535,1680 500,1680 485,1695 485,1705 495,1715 531.57,1715 541.57,1725 ; J3.2 541.57,1725 ; J3.2@550.22,1737.61 ccw(c555.09,1725) 541.57,1725 ; U4.9 1320.43,1625.43 1455,1760 1455,1895 1475,1915 1545,1915 J2.2 ; 1548.79,1911.21 ccw(c1600,1962.43) J2.2@1600,1890 ; 1560.86,1899.14 cw(c1526.72,1865) J2.2@1575,1865 ; 1565.86,1894.14 ccw(c1600,1928.28) J2.2@1600,1880
  Bottom Layer w10: J3.2 535,1760 510,1735 510,1708.28 538.28,1680 1375,1680 1450,1755 1450,1895 1480,1925 1535,1925 J2.2 ; 1548.79,1911.21 ccw(c1600,1962.43) J2.2@1600,1890 ; 1560.86,1899.14 cw(c1526.72,1865) J2.2@1575,1865 ; 1565.86,1894.14 ccw(c1600,1928.28) J2.2@1600,1880
USB_V: C2.1 J2.1 J3.1 R1.1 | length 4412
  Top Layer w20: v1@295,1085.26 ccw(c260.85,1085.84) 285,1110 ; v1@309.74,1100 cw(c309.16,1134.15) 285,1110 ; v1@310,870 cw(c310,833.79) 335.61,859.39 cw(c361.21,885) v1@325,885 ; v1(310,885) 360,835 ; v1(310,1085) 285,1110 ; v1@313.18,881.82 cw(c236.36,805) R1.1@345,805 ; 347.32,847.68 cw(c304.64,805) R1.1@365,805 ; R1.1@351,817 ccw(c337.5,835) 360,835 ; R1.1 360,835 ; R1.1@369,817 cw(c382.5,835) 360,835 ; J3.1@626.56,1773.44 ccw(c594.13,1805.87) 640,1805.87 ccw(c685.87,1805.87) J3.1@653.44,1773.44 ; J3.1 640,1935 ; C2.1@1640.55,1399.45 ccw(c1593.61,1446.39) 1660,1446.39 ccw(c1726.39,1446.39) C2.1@1679.45,1399.45 ; C2.1 1660,1750 1700,1790 1700,1905 ; 1676.07,1928.93 cw(c1617.82,1870.68) J2.1@1700,1865 ; J2.1@1685.86,1840.86 cw(c1651.72,1806.72) 1700,1806.72 cw(c1748.28,1806.72) J2.1@1714.14,1840.86 ; J2.1@1688,1881 ccw(c1670,1905) 1700,1905 ; J2.1@1712,1881 cw(c1730,1905) 1700,1905 ; 285,1110 165,1110 90,1185 90,1890 140,1940 1665,1940 1700,1905
  Bottom Layer w20: v1@299.39,895.61 ccw(c273.79,921.21) 310,921.21 ccw(c346.21,921.21) v1@320.61,895.61 ; v1@299.39,1074.39 cw(c273.79,1048.79) 310,1048.79 cw(c346.21,1048.79) v1@320.61,1074.39 ; v1(310,885) v1(310,1085)
VBUS: C6.1 R1.2 R4.2 R9.2 U2.8 | length 1618.3
  Top Layer w30: R4.2@335.08,503.2 cw(c368.16,506.19) R4.2@344.67,529.67 ; R1.2@349.87,697.76 ccw(c365.61,724.54) 387.57,702.57 ; R4.2 355,540 390,575 ; R4.2@364.96,505.9 cw(c451.29,513.7) 390,575 ; R1.2@365.07,723.62 ccw(c385.91,759.09) 415,730 ; 400,575 360,615 R1.2 395,710 415,730 ; 421.5,776.5 cw(c453.98,744.02) R9.2@472.88,785.89 ; 440.85,795.85 cw(c475.15,761.56) R9.2@478.3,809.96 ; R9.2 440,795 415,770 415,730 ; 857.75,582.25 cw(c798,522.5) C6.1@882.5,522.5 ; C6.1@859.09,491.59 cw(c820.68,453.18) 875,453.18 cw(c929.32,453.18) C6.1@890.91,491.59 ; C6.1@862.35,541.11 ccw(c846.12,565) 875,565 ; C6.1@887.65,541.11 cw(c903.88,565) 875,565 ; 900,405 875,430 875,565 ; 390,575 590,575 635,620 820,620 875,565
VCC: C1.1 C3.1 C4.1 C11.1 C12.1 J4.1 J4.2 J5.1 R2.2 R7.2 R8.2 U1.9 U1.28 U3.2 U4.7 U4.20 | length 8068.3
  Top Layer w10: U1.9@630.76,1475.76 cw(c620.51,1465.51) 635,1465.51 cw(c649.49,1465.51) U1.9@639.24,1475.76 ; U1.9@630.76,1534.24 ccw(c620.51,1544.49) 635,1544.49 ccw(c649.49,1544.49) U1.9@639.24,1534.24 ; v1@1010.59,1364.84 ccw(c989.98,1369.97) 1005,1385 ; v1@1025.16,1379.41 cw(c1020.03,1400.02) 1005,1385 ; v1(1030,1360) 1005,1385 ; C3.1@1101.52,1705.28 ccw(c1085,1696.1) 1085,1715 ; C3.1@1101.52,1724.72 cw(c1085,1733.9) 1085,1715 ; C3.1 1085,1715 ; U4.7 1371.61,1601.61 1440,1670 1570,1670 1600,1640 ; C1.1@1588,1616 ccw(c1570,1640) 1600,1640 ; C1.1 1600,1640 ; C1.1@1612,1616 cw(c1630,1640) 1600,1640 ; 1005,1385 705,1385 635,1455 635,1550 655,1570 770,1570 810,1610 810,1640 840,1670 1040,1670 1085,1715
  Top Layer w15: v1@1587.63,1527.37 ccw(c1557.75,1557.25) 1600,1557.25 ccw(c1642.25,1557.25) v1@1612.37,1527.37 ; C1.1@1587.63,1587.63 cw(c1557.75,1557.75) 1600,1557.75 cw(c1642.25,1557.75) C1.1@1612.37,1587.63 ; v1(1600,1515) C1.1
  Top Layer w20: C4.1@1021.39,940.61 ccw(c988.54,973.46) 1035,973.46 ; v1@1024.39,1034.39 cw(c998.79,1008.79) 1035,1008.79 cw(c1071.21,1008.79) v1@1045.61,1034.39 ; v1@1024.39,1055.61 ccw(c998.79,1081.21) 1035,1081.21 ccw(c1071.21,1081.21) v1@1045.61,1055.61 ; C4.1 1035,928 U1.28 ; 1035,958.97 ccw(c1060.97,958.97) C4.1@1042.61,940.61 ; R8.2@1479.39,1005.61 ccw(c1453.79,1031.21) 1490,1031.21 ccw(c1526.21,1031.21) R8.2@1500.61,1005.61 ; R8.2 1490,1050 1535,1095 1535,1230
  Top Layer w30: R7.2@588.13,806.79 cw(c602.75,784.21) R7.2@621.77,803.23 ; R7.2@599,780 cw(c599,668.95) 677.53,747.47 ; R7.2@599,810 cw(c599,771.37) 626.31,798.69 ; R7.2@604.44,781.61 cw(c623.37,752.37) 648,777 ; R7.2@608.3,803.67 cw(c657.08,822.92) 620,860 ; 850.25,885.25 cw(c910,825.5) R2.2@910,910 ; C4.1 890,925 825,860 620,860 ; U3.2@1423.39,700.61 ccw(c1397.79,726.21) 1434,726.21 ccw(c1470.21,726.21) U3.2@1444.61,700.61 ; U3.2 1434,759 ; R8.2 1655,990 1705,940 1705,805 1660,760 C11.1 1860,640 ; C11.1@1644.09,655.91 ccw(c1605.68,694.32) 1660,694.32 ccw(c1714.32,694.32) C11.1@1675.91,655.91 ; 1660,705 1605,760 1140,760 1055,675 900,675 855,720 705,720 630,795 R7.2 599,839 620,860 ; C11.1@1683.41,624.09 cw(c1721.82,585.68) 1721.82,640 cw(c1721.82,694.32) C11.1@1683.41,655.91 ; 1722.22,640 cw(c1722.22,467.22) J4.2@1844.39,589.39 ; 1794.64,640 cw(c1794.64,539.64) J4.2@1865.61,610.61 ; J4.2@1849.39,610.61 ccw(c1823.79,636.21) 1860,636.21 ccw(c1896.21,636.21) J4.2@1870.61,610.61 ; J4.1@1849.39,689.39 cw(c1823.79,663.79) 1860,663.79 cw(c1896.21,663.79) J4.1@1870.61,689.39 ; J4.2 J4.1
  Bottom Layer w10: v1@1015.86,1345.86 cw(c981.72,1311.72) 1030,1311.72 cw(c1078.28,1311.72) v1@1044.14,1345.86 ; v1@1020.86,1059.14 ccw(c998.79,1081.21) 1030,1081.21 ccw(c1071.21,1081.21) v1@1042.07,1052.07 ; 1030,1105.36 ccw(c1095.36,1105.36) v1@1049.14,1059.14 ; v1(1030,1360) 1030,1050 v1(1035,1045)
  Bottom Layer w15: v1(1600,1515) 1810,1515 1860,1465 J5.1 1905,1400 ; v1@1612.37,1502.63 cw(c1642.25,1472.75) 1642.25,1515 cw(c1642.25,1557.25) v1@1612.37,1527.37 ; J5.1@1844.09,1415.91 ccw(c1805.68,1454.32) 1860,1454.32 ccw(c1914.32,1454.32) J5.1@1875.91,1415.91 ; J4.1 1905,700 ; J4.1@1884.23,688.32 cw(c1905,675.7) 1905,700 ; J4.1@1884.23,711.68 ccw(c1905,724.3) 1905,700 ; J5.1@1884.23,1388.32 cw(c1905,1375.7) 1905,1400 ; J5.1@1884.23,1411.68 ccw(c1905,1424.3) 1905,1400 ; 1905,700 1925,720 1925,1380 1905,1400
VIN: C5.1 C9.1 C10.1 J1.1 L2.1 R3.1 R7.1 R9.1 TF1.3 U2.5 U3.3 | length 4553.1
  Top Layer w15: C5.1@861.24,230.91 ccw(c829.9,270) 880,270 ; C5.1 880,270 ; C5.1@898.76,230.91 cw(c930.1,270) 880,270 ; U2.5 863.2,318.2 850,305 860,290 880,270
  Top Layer w30: 35.25,640.25 cw(c95,580.5) TF1.3@95,665 ; TF1.3@75,680 40,645 40,395 70,365 105,365 140,330 140,230 190,180 R3.1 362,133 385,110 1010,110 ; R9.1 R7.1 634,670 845,670 885,630 1100,630 1130,660 U3.3 1348,578 1285,515 1285,320 1320,285 J1.1 1120,220 1010,110 ; R7.1@584.86,685.86 ccw(c623.14,724.14) 623.14,670 ; R7.1@599,690 cw(c599,653.79) 624.61,679.39 ; R7.1@606.07,707.07 ccw(c695.57,796.57) 695.57,670 ; 860,110 880,130 C5.1 ; C5.1@864.09,176.59 cw(c825.68,138.18) 880,138.18 cw(c934.32,138.18) C5.1@895.91,176.59 ; 936.02,110 ccw(c936.02,233.98) L2.1@1023.69,146.31 ; 1008.44,110 ccw(c1008.44,161.56) L2.1@1044.9,125.1 ; L2.1@1019.03,133.97 cw(c988.04,131.96) 1010,110 ; L2.1@1033.97,119.03 ccw(c1031.96,88.04) 1010,110 ; L2.1@1035,151 ccw(c1035,189.63) 1062.31,162.31 ccw(c1089.63,135) L2.1@1051,135 ; C9.1@1176.59,644.09 ccw(c1138.18,605.68) 1138.18,660 ccw(c1138.18,714.32) C9.1@1176.59,675.91 ; C9.1@1223.41,644.09 cw(c1261.82,605.68) 1261.82,660 cw(c1261.82,714.32) C9.1@1223.41,675.91 ; J1.1@1310.1,210.1 ccw(c1286.2,186.2) 1286.2,220 ccw(c1286.2,253.8) 1310.1,229.9 ccw(c1286.2,253.8) 1320,253.8 ccw(c1353.8,253.8) J1.1@1329.9,229.9 ; U3.3@1337.39,619.39 cw(c1311.79,593.79) 1348,593.79 cw(c1384.21,593.79) U3.3@1358.61,619.39 ; U3.3@1337.39,649.39 ccw(c1311.79,623.79) 1311.79,660 ccw(c1311.79,696.21) U3.3@1337.39,670.61
WR#: R12.1 U1.3 | length 221
  Top Layer w15: U1.3 935,1600 960,1625 ; R12.1@983.47,1613.9 ccw(c960,1594.64) 960,1625 ; R12.1@983.47,1636.1 cw(c960,1655.36) 960,1625 ; R12.1 960,1625
XI: U1.13 X2.1 | length 564
  Top Layer w10: X2.1@241.62,1278.38 ccw(c197.23,1322.77) 260,1322.77 ccw(c322.77,1322.77) X2.1@278.38,1278.38 ; X2.1@248.69,1271.31 ccw(c221.37,1298.63) 260,1298.63 ccw(c298.63,1298.63) X2.1@271.31,1271.31 ; X2.1 260,1325 285,1350 395,1350 419.5,1374.5 419.5,1435 435,1450.5 U1.13 ; U1.13@430.76,1475.76 cw(c420.51,1465.51) 435,1465.51 cw(c449.49,1465.51) U1.13@439.24,1475.76
XO: U1.14 X2.2 | length 515.8
  Top Layer w10: X2.2@242.22,1441.03 cw(c203.78,1400) 260,1400 ; X2.2@249.06,1448.32 cw(c225.4,1423.08) 260,1423.08 cw(c294.6,1423.08) X2.2@270.94,1448.32 ; X2.2 260,1400 ; X2.2@277.78,1441.03 ccw(c316.22,1400) 260,1400 ; U1.14@380.76,1475.76 cw(c370.51,1465.51) 385,1465.51 cw(c399.49,1465.51) U1.14@389.24,1475.76 ; U1.14 385,1450 399.5,1435.5 399.5,1384.5 385,1370 290,1370 260,1400
pads on no net: J1.2 J1.3 U2.3 U3. U4.1 U4.6 U4.17 U4.18 U4.19

## Polygon pours and split planes (outlines as drawn)
GND on Top Layer (solid): 0,0 1970,0 1970,1970 0,1970
GND on Bottom Layer (solid): 0,0 1970,0 1970,1970 0,1970

## Keep-outs
Keep-Out Layer:
  lines w10: 0,0 0,1968.5 1968.5,1968.5 1968.5,0 0,0

## Other copper
Top Layer:
  rectangle net VIN: 845,185 915,315
Bottom Layer:
  rectangle net GND: 50,830 170,930

## Silkscreen, mask and mechanical layers (free items; w line width, h text height)
Top Overlay:
  text "USB" at 71.16,1897.8 h60 r270
  text "USB" at 1765,1825 h60
  text "GND D+D- V" at 1215,1740 h60
  text "- T R +" at 1800,1060 h60 r90
  text "UART" at 1725,970 h60
  text "DI" at 170,955 h60
  text "-" at 185,855 h60
  text "CK" at 170,755 h60
  text "+" at 190,650 h60
  text "3V3" at 1800,570 h60 r90
  text "DO" at 175,560 h60
  text "CS" at 175,445 h60
  text "SPI" at 70,375 h60 r270
  text "GND" at 1800,355 h60 r90
  text "_" at 1740,245 h60
  text "5V" at 1090,215 h60
  text "Power" at 1910,50 h60 r90
Bottom Overlay:
  text "20120928" at 720,65 h60

## Text inside footprints (layer, text, board x,y; h text height)
J1: Top Overlay "G" at 1580,100 h50; Top Overlay "V" at 1300,100 h50; Top Overlay "D+" at 1470,100 h50; Top Overlay "D-" at 1380,100 h50
J3: Top Overlay "G" at 380,1880 h50 r180; Top Overlay "V" at 660,1880 h50 r180; Top Overlay "D+" at 490,1880 h50 r180; Top Overlay "D-" at 580,1880 h50 r180